# Altium PCB boardBIG.PcbDoc
Units mil, origin at the board's own origin, x right, y up, seen from the top; angles counter-clockwise.
Board outline 3600 x 3600 mil, 2 copper layers (Top Layer, Bottom Layer); 52 components, 44 nets, 217 pads, 2 vias.
Unrouted connection lines stored in the file: 68.
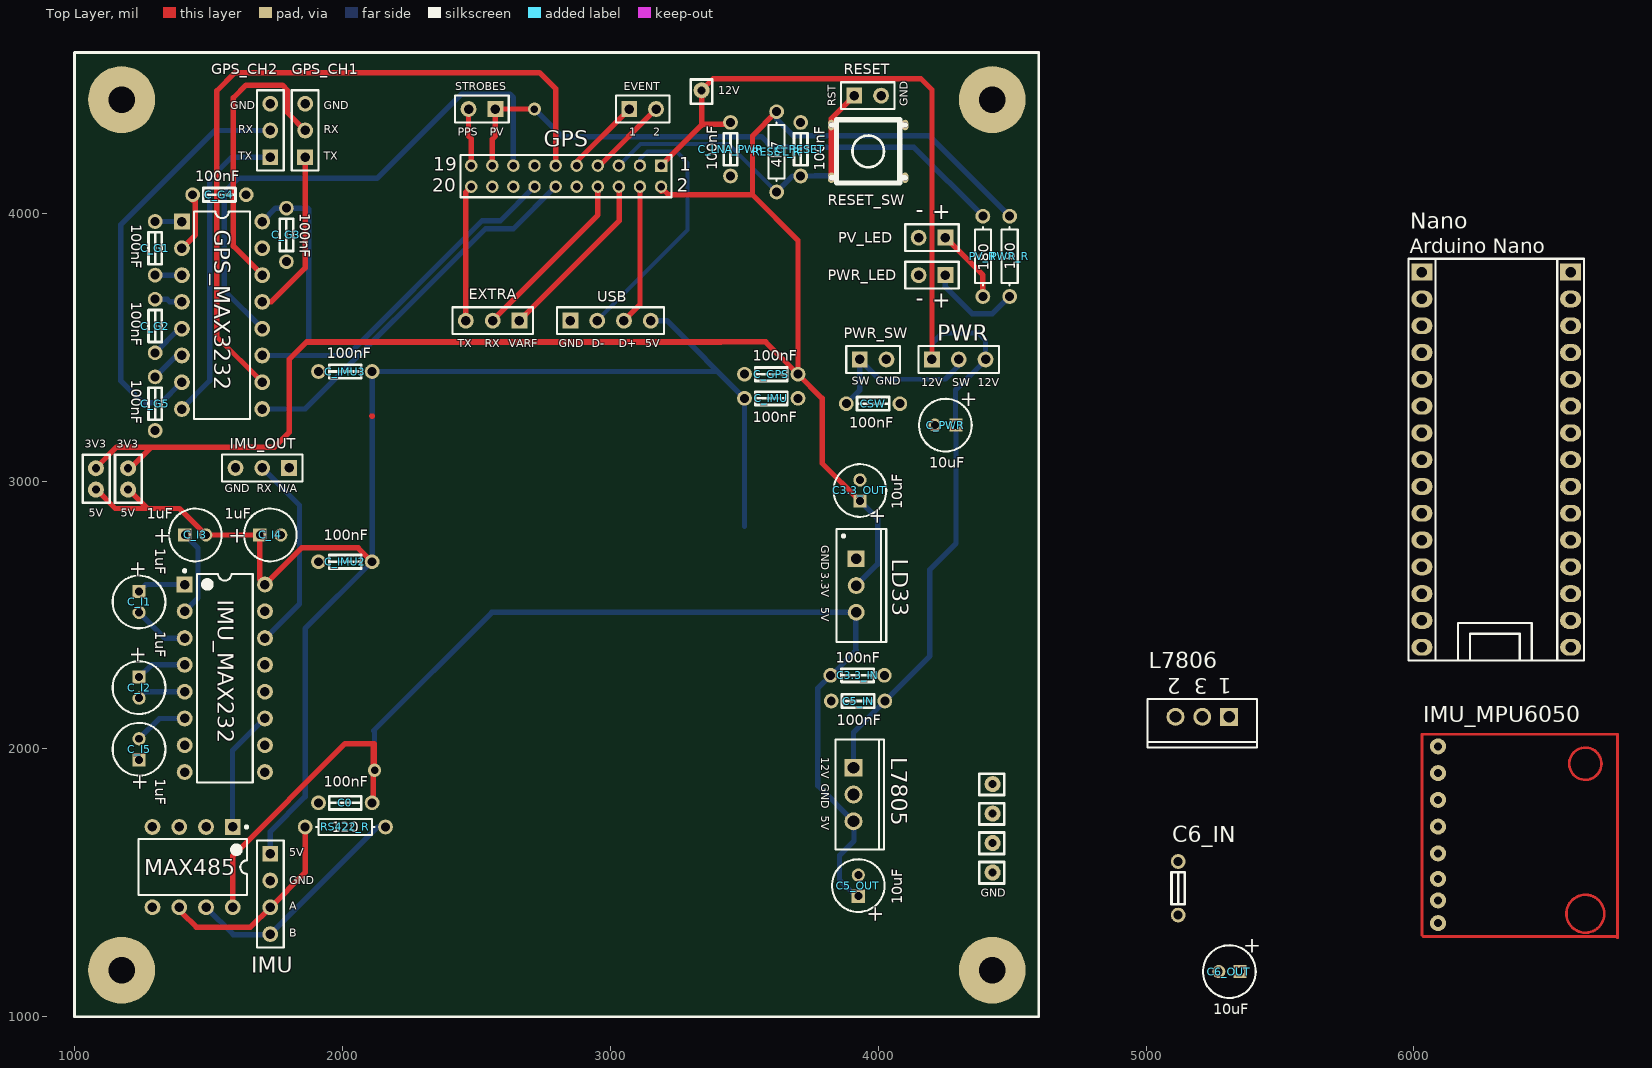
[diagram p0: Top Layer view]
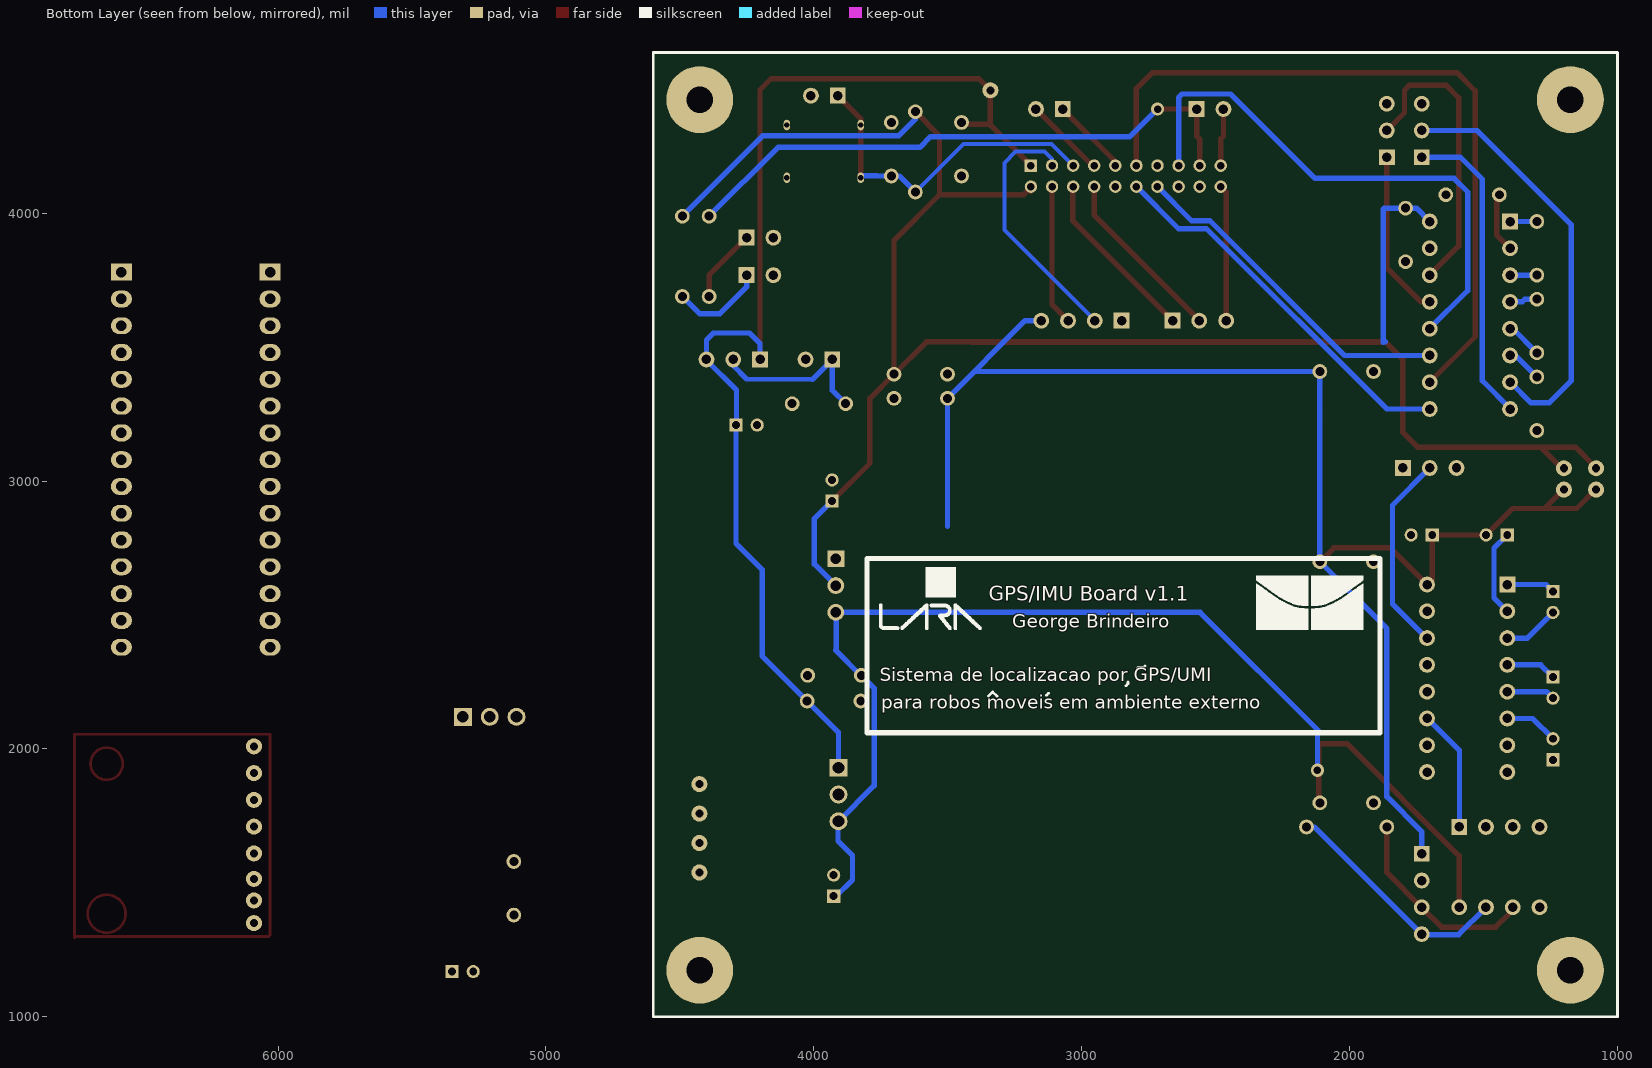
[diagram p1: Bottom Layer view, seen from below]

## Layer stack, top to bottom
Top Solder: solder mask 0.4, Solder Resist, Dk 3.5
Top Layer: signal copper 1.4
Dielectric1: dielectric 12.6, FR-4, Dk 4.8
Bottom Layer: signal copper 1.4
Bottom Solder: solder mask 0.4, Solder Resist, Dk 3.5

## Board outline
1000,1000 4600,1000 4600,4600 1000,4600

## Design rules (kind name [scope] priority, off if disabled: settings)
Clearance [All] p1: gap=10 ignorepadtopadclearanceinfootprint=FALSE except(0: Arc-Hole Track-Hole SMDPad-Hole THPad-Hole Via-Hole Fill-Hole Poly-Hole Region-Hole Text-Hole)
FabricationTestPointUsage TestPointUsage [All] p1: valid=0 allowmultiple=FALSE
FabricationTestpoint Testpoint [All] p1: side=3 testpointundercomponent=TRUE minsize=40 maxsize=100 preferedsize=60 minholesize=0 maxholesize=40 preferedholesize=32 testpointgrid=1 allowsidetop=TRUE allowsidebottom=TRUE usegrid=TRUE gridtolerance=0.01
HoleSize [All] p1: absolutevalues=TRUE maxlimit=100 minlimit=20 maxpercent=80.000 minpercent=20.000
PolygonConnect [All] p1: connectstyle=Relief reliefconductorwidth=10 reliefentries=4 polygonreliefangle="90 Angle" airgapwidth=10
RoutingVias [All] p1: holewidth=28 width=50 viastyle="Through Hole" minholewidth=28 minwidth=50 maxholewidth=28 maxwidth=50
SilkToSolderMaskClearance SilkscreenOverComponentPads [IsPad] p1: minsilkscreentomaskgap=10 clearancetoexposedcopper=TRUE
SolderMaskExpansion [All] p1: expansion=4
Width [All] p1: maxlimit=20 minlimit=6 preferedwidth=20
26 further rules are at their usual default settings.

## Components (designator, comment, footprint, x,y, rotation, side; value= is the part's Value field where it differs from the comment)
C0 "100nF" C_NANO_HOLES 1911,1799 r0 top
C3.3_IN "100nF" C_NANO_HOLES 3823,2275 r0 top
C3.3_OUT "10uF" B 3932,2965 r90 top
C5_IN "100nF" C_NANO_HOLES 4025,2179 r180 top
C5_OUT "10uF" B 3926,1490 r90 top
C6_IN "100nF" C_NANO_HOLES 5120,1380 r90 top
C6_OUT "10uF" B 5311,1169 r180 top
C_G1 "100nF" C_NANO_HOLES 1301,3769 r90 top
C_G2 "100nF" C_NANO_HOLES 1301,3479 r90 top
C_G3 "100nF" C_NANO_HOLES 1791,3819 r90 top
C_G4 "100nF" C_NANO_HOLES 1641,4069 r180 top
C_G5 "100nF" C_NANO_HOLES 1301,3189 r90 top
C_GPS "100nF" C_NANO_HOLES 3501,3399 r0 top
C_I1 "1uF" B 1241,2549 r270 top
C_I2 "1uF" B 1241,2229 r270 top
C_I3 "1uF" B 1451,2799 r0 top
C_I4 "1uF" B 1731,2799 r0 top
C_I5 "1uF" B 1241,1999 r90 top
C_IMU "100nF" C_NANO_HOLES 3701,3309 r180 top
C_IMU2 "100nF" C_NANO_HOLES 1911,2699 r0 top
C_IMU3 "100nF" C_NANO_HOLES 1911,3409 r0 top
C_LNA_PWR "100nF" C_NANO_HOLES 3449,4139 r90 top
C_PWR "10uF" B 4251,3209 r180 top
C_RESET "100nF" C_NANO_HOLES 3711,4339 r270 top
CSW "100nF" C_NANO_HOLES 3881,3289 r0 top
EVENT "Header 2" HDR1X2 3071,4389 r0 top
EXTRA "Header 3" HDR1X3 2661,3599 r180 top
GPS "Header 10X2" HDR2x10_2mm 2481,4099 r0 top
GPS_CH1 "MHDR1X3" HDR1X3 1861,4209 r90 top
GPS_CH2 "MHDR1X3" HDR1X3 1731,4209 r90 top
GPS_MAX3232 "MAX3232EEPE" PE16 1551,3619 r270 top
IMU "Header 4" HDR1X4 1731,1609 r270 top
IMU_MAX232 "MAX232ACPE" PE16A 1561,2264 r0 top
IMU_MPU6050 "MPU6050" MPU6050 6090,1350 r0 top
IMU_OUT "MHDR1X3" HDR1X3 1801,3049 r180 top
L7805 "L7805ACV" TO220ABN 3908,1830 r270 top
L7806 "L7806CV" TO220ABN 5210,2120 r180 top
LD33 "LD33V" T03B 3918,2610 r270 top
MAX485 "MAX485CPA" PA8 1441,1559 r270 top
Nano "Arduino Nano" ArduinoNano 6300,3040 r90 top
PV_LED "PV" HDR1X2 4251,3909 r180 top
PV_R "180" AXIAL-0.3 4391,3839 r90 top
PWR "Header 3" HDR1X3 4201,3454 r0 top
PWR_LED "PWR" HDR1X2 4251,3769 r180 top
PWR_R "180" AXIAL-0.3 4491,3839 r90 top
PWR_SW "Header 2" HDR1X2 3931,3454 r0 top
RESET "Header 2" HDR1X2 3911,4439 r0 top
RESET_R "4k7" AXIAL-0.3 3621,4229 r90 top
RESET_SW "SW-PB" PUSHBUTTON 4081,4349 r180 top
RS422_R "120" AXIAL-0.3 2011,1709 r0 top
STROBES "Header 2" HDR1X2 2571,4389 r180 top
USB "Header 4" HDR1X4 2851,3599 r0 top

## Footprints (in the part's own frame and the unit in brackets; to place one, negate y for a bottom-side part, rotate by r counter-clockwise, add the part's x,y. Pads: shape width x height; smd on the part's side, far side on the other; paste and mask are expansions set on the pad)
ArduinoNano [mm]
  rect 1.6x2 hole 1: 1(18.796,6.858) 30(18.796,-7.239)
  oval 1.6x2 hole 1: 2(16.256,6.858) 3(13.716,6.858) 4(11.176,6.858) 5(8.636,6.858) 6(6.096,6.858) 7(3.556,6.858) 8(1.016,6.858) 9(-1.524,6.858) 10(-4.064,6.858) 11(-6.604,6.858) 12(-9.144,6.858) 13(-11.684,6.858) 14(-14.224,6.858) 15(-16.764,6.858) 16(-16.764,-7.239) 17(-14.224,-7.239) 18(-11.684,-7.239) 19(-9.144,-7.239) 20(-6.604,-7.239) 21(-4.064,-7.239) 22(-1.524,-7.239) 23(1.016,-7.239) 24(3.556,-7.239) 25(6.096,-7.239) 26(8.636,-7.239) 27(11.176,-7.239) 28(13.716,-7.239) 29(16.256,-7.239)
  silkscreen extent -18.03,-8.51 20.07,8.13
AXIAL-0.3 [mm] "Resistor; 2 Leads"
  round 1.4 hole 0.85: 1(-3.81,0) 2(3.81,0)
  silkscreen extent -2.77,-0.76 2.77,0.76
B [mm] "Capacitor, Electrolytic, Radial; Body 5 x 6.8 mm (Dia.xH typ); Pin Spacing 2 mm (typ)"
  rect 1.25x1.25 hole 0.75: 1(-1,0)
  round 1.25 hole 0.75: 2(1,0)
  silkscreen extent -2.5,-2.5 2.5,2.5
C_NANO_HOLES [mm] "C_NANO com furos maiores"
  round 1.4 hole 0.85: 1(0,0) 2(5.08,0)
  silkscreen extent 1.02,-0.64 4.06,0.64
HDR1X2 [mm] "Connector; Header; 2 Position"
  rect 1.5x1.5 hole 0.9: 1(0,0)
  round 1.5 hole 0.9: 2(2.54,0)
  silkscreen extent -1.27,-1.27 3.81,1.27
HDR1X3 [mm] "Connector; Header; 3 Position"
  rect 1.5x1.5 hole 0.9: 1(0,0)
  round 1.5 hole 0.9: 2(2.54,0) 3(5.08,0)
  silkscreen extent -1.27,-1.27 6.35,1.27
HDR1X4 [mm] "Connector; Header; 4 Position"
  rect 1.5x1.5 hole 0.9: 1(0,0)
  round 1.5 hole 0.9: 2(2.54,0) 3(5.08,0) 4(7.62,0)
  silkscreen extent -1.27,-1.27 8.89,1.27
HDR2x10_2mm [mm]
  rect 1.18x1.18 hole 0.71: 1(18,2)
  round 1.18 hole 0.71: 2(18,0) 3(16,2) 4(16,0) 5(14,2) 6(14,0) 7(12,2) 8(12,0) 9(10,2) 10(10,0) 11(8,2) 12(8,0) 13(6,2) 14(6,0) 15(4,2) 16(4,0) 17(2,2) 18(2,0) 19(0,2) 20(0,0)
  silkscreen extent -1,-1 19,3
MPU6050 [mil]
  round 60 hole 30: 0(0,660) 1(0,560) 2(0,460) 3(0,360) 4(0,260) 5(0,165) 6(0,85) 7(0,0)
  Top Layer circle w10: c550,595 r60.21
  Top Layer circle w10: c550,35 r70.71
  Top Layer lines w10: -60,-45 -55,-50 665,-50 670,-55 670,705 -30,705 -60,705 -60,-45
PA8 [mm] "DIP, 8-Leads, Row Spacing 7.62mm, Pitch 2.54mm, Body 9.38x7.24mm"
  rect 1.5x1.5 hole 0.9: 1(-3.81,3.81)
  round 1.5 hole 0.9: 2(-3.81,1.27) 3(-3.81,-1.27) 4(-3.81,-3.81) 5(3.81,-3.81) 6(3.81,-1.27) 7(3.81,1.27) 8(3.81,3.81)
  silkscreen extent -3.93,-5.15 2.65,5.24
PE16 [mm] "DIP; 16 Leads; Row Spacing 7.62 mm; Pitch 2.54 mm"
  rect 1.5x1.5 hole 0.9: 1(-8.89,-3.81)
  round 1.5 hole 0.9: 2(-6.35,-3.81) 3(-3.81,-3.81) 4(-1.27,-3.81) 5(1.27,-3.81) 6(3.81,-3.81) 7(6.35,-3.81) 8(8.89,-3.81) 9(8.89,3.81) 10(6.35,3.81) 11(3.81,3.81) 12(1.27,3.81) 13(-1.27,3.81) 14(-3.81,3.81) 15(-6.35,3.81) 16(-8.89,3.81)
  silkscreen extent -9.85,-2.65 9.85,2.65
PE16A [mm] "DIP, 16-Leads, Row Spacing 7.62mm, Pitch 2.54mm, Body 19.18x6.99mm"
  rect 1.5x1.5 hole 0.9: 1(-3.81,8.89)
  round 1.5 hole 0.9: 2(-3.81,6.35) 3(-3.81,3.81) 4(-3.81,1.27) 5(-3.81,-1.27) 6(-3.81,-3.81) 7(-3.81,-6.35) 8(-3.81,-8.89) 9(3.81,-8.89) 10(3.81,-6.35) 11(3.81,-3.81) 12(3.81,-1.27) 13(3.81,1.27) 14(3.81,3.81) 15(3.81,6.35) 16(3.81,8.89)
  silkscreen extent -3.93,-9.9 2.65,10.31
PUSHBUTTON [mm]
  oval 0.6x1 hole 0.5: 1(-0.5,5.5) 1_1(-0.5,0.5) 2(6.5,5.5) 2_1(6.5,0.5)
  silkscreen extent -0.5,0 6.5,6
T03B [mm] "TO, Thru-Hole, Vertical, Heatsink Mounted; 3 In-Line Leads; Pitch 2.54 mm"
  rect 1.6x1.6 hole 1: 1(-2.54,0)
  round 1.6 hole 1: 2(0,0) 3(2.54,0)
  silkscreen extent -5.35,-1.85 5.35,2.85
TO220ABN [mm] "TO, Thru-Hole, Vertical, Heatsink Mounted; 3 In-Line Leads; Pitch 2.54 mm; Pin sequence 1, 3, 2"
  rect 1.7x1.7 hole 1.1: 1(-2.54,0)
  round 1.7 hole 1.1: 2(2.54,0) 3(0,0)
  silkscreen extent -5.2,-1.7 5.2,2.9

## Part data
C0 C3.3_IN C5_IN C6_IN C_G1 C_G2 C_G3 C_G4 C_G5 C_GPS C_IMU C_IMU2 C_IMU3 C_LNA_PWR C_RESET CSW: library part Cap, "Capacitor", LatestRevisionDate=17-Jul-2002, LatestRevisionNote="Re-released for DXP Platform.", PackageReference=RAD-0.3, Published=8-Jun-2000, Publisher="Altium Limited"
C3.3_OUT C5_OUT C6_OUT C_I1 C_I2 C_I3 C_I4 C_I5 C_PWR: library part "Cap Pol1", "Polarized Capacitor (Radial)", LatestRevisionDate=17-Jul-2002, LatestRevisionNote="Re-released for DXP Platform.", PackageReference=RB7.6-15, Published=8-Jun-2000, Publisher="Altium Limited"
EVENT STROBES: "Header, 2-Pin", LatestRevisionDate=17-Jul-2002, LatestRevisionNote="Re-released for DXP Platform.", Publisher="Altium Limited"
EXTRA GPS_CH1 GPS_CH2 IMU_OUT: "Header, 3-Pin", LatestRevisionDate=17-Jul-2002, LatestRevisionNote="Re-released for DXP Platform.", Publisher="Altium Limited"
GPS: "Header, 10-Pin, Dual row", LatestRevisionDate=17-Jul-2002, LatestRevisionNote="Re-released for DXP Platform.", Publisher="Altium Limited"
GPS_MAX3232: "±15kV ESD-Protected, 3.0V to 5.5V, Low-Power, up to 250kbps, True RS-232 Transceiver", Code_JEDEC=MS-001-BB, ComponentLink1Description="Manufacturer Link", ComponentLink1URL=http://www.maxim-ic.com/, ComponentLink2Description=Datasheet, ComponentLink2URL=http://pdfserv.maxim-ic.com/en/ds/MAX3222E-MAX3246E.pdf, DatasheetVersion=Mar-1999, LatestRevisionDate=06-Jun-2005, LatestRevisionNote="Stylized 3D Model Added.", PackageDescription="DIP; 16 Leads; Row Spacing 7.62 mm; Pitch 2.54 mm", PackageReference=PE16, PackageVersion=Aug-2000, Published=16-Jan-2001, Publisher="Altium Limited"
IMU USB: "Header, 4-Pin", LatestRevisionDate=17-Jul-2002, LatestRevisionNote="Re-released for DXP Platform.", Publisher="Altium Limited"
IMU_MAX232: "+5V Powered, Multi-Channel RS-232 Driver/Receiver", Code_JEDEC=MS-001-BB, ComponentLink1Description="Manufacturer Link", ComponentLink1URL=http://www.maxim-ic.com/, ComponentLink2Description=Datasheet, ComponentLink2URL=http://pdfserv.maxim-ic.com/en/ds/MAX220-MAX249.pdf, LatestRevisionDate=06-Jun-2005, LatestRevisionNote="Stylized 3D Model Added.", PackageDescription="DIP; 16 Leads; Row Spacing 7.62 mm; Pitch 2.54 mm", PackageReference=PE16A, PackageVersion=1997, Published=16-Jan-2001, Publisher="Altium Limited"
IMU_MPU6050 Nano: library part Component_1
L7805: "Precision 1A Regulator", ComponentLink1Description="Manufacturer Link", ComponentLink1URL=http://www.st.com/, ComponentLink2Description=Datasheet, ComponentLink2URL=http://www.st.com/stonline/products/literature/ds/2144/l7805ab.pdf, DatasheetVersion=Nov-1999, LatestRevisionDate=17-Jul-2002, LatestRevisionNote="Re-released for DXP Platform.", Note="Tab is connected to pin 3 (GND).", PackageDescription="TO, Thru-Hole, Vertical, Heatsink Mounted; 3 In-Line Leads; Pitch 2.54 mm; Pin sequence 1, 3, 2", PackageReference=TO220ABN, PackageVersion=Jun-1998, Published=24-Aug-2001, Publisher="Altium Limited"
L7806: "Positive Voltage Regulator", ComponentLink1Description="Manufacturer Link", ComponentLink1URL=http://www.st.com/, DatasheetVersion=Dec-1998, LatestRevisionDate=17-Jul-2002, LatestRevisionNote="Re-released for DXP Platform.", Note="Tab is connected to pin 3 (GND).", PackageDescription="TO, Thru-Hole, Vertical, Heatsink Mounted; 3 In-Line Leads; Pitch 2.54 mm; Pin sequence 1, 3, 2", PackageReference=TO220ABN, PackageVersion=Jun-1998, Published=24-Aug-2001, Publisher="Altium Limited"
LD33: library part LM1117T-3.3, "800mA Low-Dropout Linear Regulator", DigiKeyPartNumber=LM1117T-3.3-ND, Manufacturer="National Semiconductor", PackageTopMarking=NSUZXYTTE#*LM1117T*3.3, ComponentLink1Description="LM1117 Datasheet", ComponentLink1URL=http://www.national.com/ds/LM/LM1117.pdf, ComponentLink2Description="LM1117 Web Page", ComponentLink2URL=http://www.national.com/pf/LM/LM1117.html, ComponentLink3Description="T03B Package Page", ComponentLink3URL=http://www.national.com/packaging/folders/t03b.html, CompType="LDO IC", DatasheetVersion=Apr-2006, PackageDescription="TO-220, Molded, 3 Lead, Straight", PackageReference=T03B, PackageVersion="revL, Jan-1992", PartNumber=LM1117T-3.3, PinCount=3, Published=4-Dec-2008, Publisher="Altium Limited", RoHS=O
MAX485: "Low-Power, Slew-Rate-Limited RS-485/RS-422 Transceiver", Code_JEDEC=MS-001-AB, ComponentLink1Description="Manufacturer Link", ComponentLink1URL=http://www.maxim-ic.com/, ComponentLink2Description=Datasheet, ComponentLink2URL=http://pdfserv.maxim-ic.com/en/ds/MAX1487-MAX491.pdf, DatasheetVersion=Feb-1996, LatestRevisionDate=29-May-2009, LatestRevisionNote="Component Body Added.", PackageDescription="DIP, 8-Pin, Row Spacing 7.62 mm, Pitch 2.54 mm", PackageReference=PA8, PackageVersion="RevB, 21-0043", Published=16-Jan-2001, Publisher="Altium Limited"
PV_LED PWR_LED: library part LED0, "Typical INFRARED GaAs LED", LatestRevisionDate=08-Jul-2005, LatestRevisionNote="Mech Layer 1 removed.", PackageReference=LED-0, Published=8-Jun-2000, Publisher="Altium Limited"
PV_R PWR_R RESET_R RS422_R: library part Res1, "Resistor", LatestRevisionDate=17-Jul-2002, LatestRevisionNote="Re-released for DXP Platform.", PackageReference=AXIAL-0.3, Published=8-Jun-2000, Publisher="Altium Limited"
PWR: library part "Header 3H", "Header, 3-Pin, Right Angle", LatestRevisionDate=17-Jul-2002, LatestRevisionNote="Re-released for DXP Platform.", Publisher="Altium Limited"
PWR_SW RESET: library part "Header 2H", "Header, 2-Pin, Right Angle", LatestRevisionDate=17-Jul-2002, LatestRevisionNote="Re-released for DXP Platform.", Publisher="Altium Limited"
RESET_SW: "Switch", LatestRevisionDate=17-Jul-2002, LatestRevisionNote="Re-released for DXP Platform.", PackageReference=SPST-2, Published=24-Mar-1999, Publisher="Altium Limited"

## Free pads (board coordinates)
  round 60 hole 30: 0(1080,3048) 0(1200,3048) 1(1080,2968) 1(1200,2968) 2(3341,4459) 3(4427,1539) 3(4427,1649) 3(4427,1759) 3(4427,1869)
  round 250 hole 100: 0(1176,4424) 1(4426,4424) 2(4426,1174) 3(1176,1174)

## Via types
v1: diameter 50, hole 28, Top Layer to Bottom Layer, 2 vias

## Nets (pads, with @x,y where several pads share a name; then routed paths per layer and width w, separated by ;. In a path a pad name is that pad's centre, name@x,y a point inside that pad or via, vN(x,y) a via of type N, cw(c..) or ccw(c..) an arc to the next point about the centre after c; other vN are vias at no path point)
3.3V: C3.3_OUT.1 C_G3.2 C_GPS.2 GPS.2 GPS_MAX3232.16 LD33.2 pad.0@1080,3048 pad.0@1200,3048 PWR_R.2 RESET_R.2 | length 8851.1
  Top Layer w20: pad.0@1080,3048 1080,3050 1157,3127 1287,3127 ; pad.0@1200,3050 1200,3048 1200,3040 1287,3127 ; 1874,3519 3412,3519 ; GPS.2 3189,4097 GPS.2@3196.67,4089.33 ; GPS.2@3190,4082.66 GPS.2@3196.67,4089.33 ; GPS.2@3201.34,4094 GPS.2@3196.67,4089.33 ; RESET_R.2 3531,4289 3531,4069 ; C3.3_OUT.1 3791,3066.63 3791,3309 C_GPS.2 ; 1287,3127 1746,3127 1802,3183 1802,3456 1866,3520 3580,3520 C_GPS.2 ; GPS.2@3196.67,4089.33 3217,4069 3531,4069 ; 3531,4069 3701,3899 C_GPS.2
  Bottom Layer w20: GPS_MAX3232.16 1751,4019 C_G3.2 1871,4019 1874,4016 1874,3519 1866,3520 ; RESET_R.2 3621,4351.44 3682.81,4289.63 4190.37,4289.63 PWR_R.2 ; LD33.2 3998,2690 3998,2859.63 C3.3_OUT.1
5V: C0.2 C3.3_IN.1 C5_OUT.1 C_I3.2 C_I4.1 IMU_MAX232.16 IMU_MPU6050.0 L7805.2 LD33.3 MAX485.8 pad.1@1080,2968 pad.1@1200,2968 USB.4 | length 7000.1
  Top Layer w20: pad.1@1080,2968 1080,2970 1152,2898 1272,2898 ; pad.1@1200,2968 1200,2970 1272,2898 ; MAX485.8 1591,1601 2010,2020 2115,2020 ; 2110,3243 2111,3242 ; 2110,3405 2111,3406 ; C0.2@2115,1799 2115,2020 ; 2115,2695 2059,2751 1848,2751 IMU_MAX232.16 1692,2633 1692,2715 1691.63,2715.37 C_I4.1 C_I3.2 1391.37,2898 1272,2898 ; v1(2120,1920) 2120,2015 ; 2120,2020 2120,2015 ; 2115,2020 2120,2015
  Bottom Layer w20: v1(2120,1920) 2120,2064 2116,2068 2558,2510 LD33.3@3917,2510 ; USB.4 3211,3599 3501,3309 3501,2831 ; 3917,2372 LD33.3@3917,2510 ; 3918,2368 3823,2273 C3.3_IN.1 3775,2227 3775,1863 L7805.2 3910,1728 3910,1657 3856,1603 3856,1511 3916.37,1450.63 C5_OUT.1 ; LD33.3 LD33.3@3917,2510
6V: C6_OUT.1 C_IMU2.2 C_IMU3.2 C_IMU.2 IMU.1 L7806.2 Nano.30 | length 3388.8
  Bottom Layer w20: IMU.1 1731,1692 1861,1822 1861,2449 C_IMU2.2 C_IMU3.2 3401,3409 C_IMU.2
12V: C5_IN.1 C6_IN.1 C_LNA_PWR.2 C_PWR.1 CSW.2 GPS.1 L7805.1 L7806.1 pad.2@3341,4459 PWR.1 PWR.3 PWR_SW.2 | length 4448.7
  Top Layer w20: GPS.1 3341,4329.08 ; C_LNA_PWR.2 3442,4332 3341,4332 3341,4459 3384,4502 4160,4502 4201,4461 PWR.1 ; C_PWR.1 C_PWR.1@4291,3208.37
  Bottom Layer w20: L7805.1 3908,2062 C5_IN.1 4193,2347 4193,2670 4290.37,2767.37 C_PWR.1@4290.37,3207.74 ; PWR.1 4201,3514 4240,3553 4375,3553 4401,3527 PWR.3 4402,3453 4289,3340 4289,3206.37 C_PWR.1@4290.37,3207.74 ; C_PWR.1 C_PWR.1@4290.37,3207.74
GND: C0.1 C3.3_IN.2 C3.3_OUT.2 C5_IN.2 C5_OUT.2 C6_IN.2 C6_OUT.2 C_G3.1 C_G4.1 C_G5.1 C_GPS.1 C_I4.2 C_I5.1 C_IMU2.1 C_IMU3.1 C_IMU.1 C_LNA_PWR.1 C_PWR.2 C_RESET.1 GPS.10 GPS.13 GPS.16 GPS.18 GPS_CH1.3 GPS_CH2.3 GPS_MAX3232.15 IMU.2 IMU_MAX232.15 IMU_MPU6050.1 IMU_OUT.3 L7805.3 L7806.3 LD33.1 MAX485.2 MAX485.3 MAX485.4 MAX485.5 Nano.4 Nano.29 pad.3@4427,1539 pad.3@4427,1649 pad.3@4427,1759 pad.3@4427,1869 PV_LED.2 PWR_LED.2 RESET.2 RESET_SW.1 RESET_SW.1_1 USB.1
GPS_CAN2_RX: EXTRA.2 GPS.8 | length 662.3
  Top Layer w20: EXTRA.2 2562,3602 2953.44,3993.44 GPS.8
GPS_CAN2_TX: EXTRA.3 GPS.20 | length 508.3
  Top Layer w20: EXTRA.3 2461,4079 GPS.20
GPS_COM1_RX: GPS.15 GPS_MAX3232.12 | length 2059.3
  Bottom Layer w20: GPS_MAX3232.12 1559,3711 1559,4079 1610,4130 2129.44,4130 2444.44,4445 2625,4445 2638.48,4431.52 GPS.15
GPS_COM1_TX: GPS.14 GPS_MAX3232.11 | length 1277.2
  Bottom Layer w20: GPS_MAX3232.11 2018.57,3469 2521.57,3972 2590.22,3972 GPS.14
GPS_COM2_RX: GPS.12 GPS_MAX3232.9 | length 1438.8
  Bottom Layer w20: GPS_MAX3232.9 1861,3269 2534,3942 2638.96,3942 GPS.12
GPS_COM2_TX: GPS.11 GPS_MAX3232.10 | length 2763.7
  Top Layer w20: GPS_MAX3232.10 1531,3539 1531,4457 1599,4525 2736,4525 2795.96,4465.04 GPS.11
GPS_EVENT1: EVENT.1 GPS.9 | length 294.3
  Top Layer w20: GPS.9 2878,4178 2878,4196 EVENT.1
GPS_EVENT2: EVENT.2 GPS.7 | length 305.8
  Top Layer w20: GPS.7 2953.44,4179 2961,4179 EVENT.2
GPS_PPS: GPS.19 STROBES.2 | length 215.4
  Top Layer w20: STROBES.2 2471,4288 2481,4278 GPS.19
GPS_PV: GPS.17 PV_R.2 STROBES.1 | length 2201.6
  Top Layer w20: GPS.17 2559.74,4277 2571,4288.26 STROBES.1 v1(2717,4389)
  Bottom Layer w20: v1(2717,4389) 2820,4286 3564,4286 3604,4246 4134,4246 PV_R.2
GPS_RESETIN: C_RESET.2 GPS.5 RESET.1 RESET_R.1 RESET_SW.2 RESET_SW.2_1 | length 1270.8
  Top Layer w20: RESET_SW.2 RESET_SW.2_1 3825.09,4353.09 RESET.1
  Bottom Layer w15: GPS.5 3112.44,4258 3442,4258 RESET_R.1
  Bottom Layer w20: RESET_R.1 3681,4139 C_RESET.2 3764,4139 3765,4140 3817.56,4140 RESET_SW.2
GPS_USB_D+: GPS.4 USB.3 | length 524.8
  Top Layer w20: USB.3 3110.92,3658.92 GPS.4
GPS_USB_D-: GPS.3 USB.2 | length 961.9
  Bottom Layer w15: USB.2@2952,3601 3289,3938 3289,4188 3246.5,4230.5 3138.5,4230.5 3110.92,4202.92 GPS.3
  Bottom Layer w20: USB.2 2951,3601 USB.2@2952,3601
GPS_VARF: EXTRA.1 GPS.6 | length 658.2
  Top Layer w20: EXTRA.1 3033,3971 3033,4101 GPS.6
IMU_HRS_A: IMU.3 MAX485.6 RS422_R.1 | length 767.4
  Top Layer w20: MAX485.6 1401.98,1409 1401.98,1388.02 1455,1335 1657,1335 IMU.3 1861,1539 RS422_R.1
IMU_HRS_B: IMU.4 MAX485.7 RS422_R.2 | length 878.8
  Bottom Layer w20: MAX485.7 1593,1307 1729,1307 IMU.4 2131,1709 RS422_R.2
IMU_TX: IMU_MAX232.11 MAX485.1 | length 456.7
  Bottom Layer w20: MAX485.1 1590,1710 1590,1995 1709,2114 IMU_MAX232.11
J1_RX: GPS_CH1.2 GPS_MAX3232.14 Nano.5 | length 1113.4
  Top Layer w20: GPS_MAX3232.14 1593,3877 1593,4431 1640,4478 1776,4478 1795,4459 1795,4375 GPS_CH1.2
J1_TX: GPS_CH1.1 GPS_MAX3232.13 Nano.6 | length 625.6
  Top Layer w20: GPS_MAX3232.13 1734,3669 1861,3796 GPS_CH1.1
J2_RX: GPS_CH2.2 GPS_MAX3232.7 Nano.7 | length 1581.2
  Bottom Layer w20: GPS_MAX3232.7 1400,3369 1323,3292 1255,3292 1173,3374 1173,3958 1524,4309 GPS_CH2.2
J2_TX: GPS_CH2.1 GPS_MAX3232.8 Nano.8 | length 1169.8
  Bottom Layer w20: GPS_MAX3232.8 1397,3267 1505,3375 1505,4128 1586,4209 GPS_CH2.1
J3_RX: IMU_MAX232.14 IMU_OUT.2 Nano.9 | length 748
  Bottom Layer w20: IMU_OUT.2 1840,2910 1840,2542 1711,2413 IMU_MAX232.14
NetC_G1_1: C_G1.1 GPS_MAX3232.3 | length 100
  Bottom Layer w20: C_G1.1 GPS_MAX3232.3
NetC_G1_2: C_G1.2 GPS_MAX3232.1 | length 100
  Bottom Layer w20: C_G1.2 GPS_MAX3232.1
NetC_G2_1: C_G2.1 GPS_MAX3232.5 | length 137.3
  Bottom Layer w20: C_G2.1 1391,3569 GPS_MAX3232.5
NetC_G2_2: C_G2.2 GPS_MAX3232.4 | length 104.1
  Bottom Layer w20: C_G2.2 1346,3679 1356,3669 GPS_MAX3232.4
NetC_G4_2: C_G4.2 GPS_MAX3232.2 | length 230.7
  Top Layer w20: GPS_MAX3232.2 1451,3919 1451,4048 1441,4048 C_G4.2
NetC_G5_2: C_G5.2 GPS_MAX3232.6 | length 133.1
  Bottom Layer w20: C_G5.2 1381,3469 GPS_MAX3232.6
NetC_I1_1: C_I1.1 IMU_MAX232.1 | length 180.6
  Bottom Layer w20: C_I1.1 1266.63,2614 IMU_MAX232.1
NetC_I1_2: C_I1.2 IMU_MAX232.3 | length 209.6
  Bottom Layer w20: C_I1.2 1336.63,2414 IMU_MAX232.3
NetC_I2_1: C_I2.1 IMU_MAX232.4 | length 188.9
  Bottom Layer w20: C_I2.1 1286.63,2314 IMU_MAX232.4
NetC_I2_2: C_I2.2 IMU_MAX232.5 | length 180.1
  Bottom Layer w20: C_I2.2 1265.37,2214 IMU_MAX232.5
NetC_I3_1: C_I3.1 IMU_MAX232.2 | length 326.2
  Bottom Layer w20: IMU_MAX232.2 1461,2564 1461,2749.63 C_I3.1
NetC_I5_2: C_I5.2 IMU_MAX232.6 | length 201.3
  Bottom Layer w20: C_I5.2 1316.63,2114 IMU_MAX232.6
NetPV_LED_1: PV_LED.1 PV_R.1 | length 278
  Top Layer w20: PV_LED.1 4391,3769 PV_R.1
NetPWR_LED_1: PWR_LED.1 PWR_R.1 | length 351.9
  Bottom Layer w20: PWR_LED.1 4251,3725 4351,3625 4427,3625 PWR_R.1
PWR_SW_2: CSW.1 PWR.2 PWR_SW.1 | length 630.4
  Bottom Layer w20: CSW.1 3931,3339 PWR_SW.1 4005.86,3379.14 4251.16,3381.16 4301,3431 PWR.2
SCL_MPU6050: IMU_MPU6050.2 Nano.24
SDA_MPU6050: IMU_MPU6050.3 Nano.23
pads on no net: IMU_MAX232.7 IMU_MAX232.8 IMU_MAX232.9 IMU_MAX232.10 IMU_MAX232.12 IMU_MAX232.13 IMU_MPU6050.4 IMU_MPU6050.5 IMU_MPU6050.6 IMU_MPU6050.7 IMU_OUT.1 Nano.1 Nano.2 Nano.3 Nano.10 Nano.11 Nano.12 Nano.13 Nano.14 Nano.15 Nano.16 Nano.17 Nano.18 Nano.19 Nano.20 Nano.21 Nano.22 Nano.25 Nano.26 Nano.27 Nano.28

## Silkscreen, mask and mechanical layers (free items; w line width, h text height)
Top Overlay:
  lines w10: 1000,1000 4600,1000 4600,4600 1000,4600 1000,1000 ; 1031,2919 1131,2919 1131,3099 1031,3099 1031,2919 ; 1151,2919 1251,2919 1251,3099 1151,3099 1151,2919 ; 3301,4409 3381,4409 3381,4499 3301,4499 3301,4409 ; 4378,1498 4378,1578 4471,1578 4471,1498 4378,1498 ; 4378,1608 4471,1608 4471,1688 4378,1688 4378,1608 ; 4378,1718 4471,1718 4471,1798 4378,1798 4378,1718 ; 4378,1828 4471,1828 4471,1908 4378,1908 4378,1828
  text "12V" at 3403,4445 h30
  text "RST" at 3841,4399 h30 r90
  text "GND" at 4111,4399 h30 r90
  text "GND" at 1581,4389 h30
  text "GND" at 1931,4389 h30
  text "RX" at 1611,4299 h30
  text "RX" at 1931,4299 h30
  text "PPS" at 2431,4289 h30
  text "PV" at 2551,4289 h30
  text "1" at 3071,4289 h30
  text "2" at 3161,4289 h30
  text "TX" at 1611,4199 h30
  text "TX" at 1931,4199 h30
  text "-" at 4171,4029 h60 r180
  text "+" at 4271,4029 h60 r180
  text "-" at 4171,3699 h60 r180
  text "+" at 4271,3699 h60 r180
  text "TX" at 2431,3499 h30
  text "RX" at 2531,3499 h30
  text "VARF" at 2621,3499 h30
  text "GND" at 2808,3499 h30
  text "D-" at 2931,3499 h30
  text "D+" at 3031,3499 h30
  text "5V" at 3130,3499 h30
  text "SW" at 3901,3359 h30
  text "GND" at 3991,3359 h30
  text "12V" at 4161,3354 h30
  text "SW" at 4276.01,3354 h30
  text "12V" at 4371,3354 h30
  text "3V3" at 1038,3124 h30
  text "3V3" at 1158,3124 h30
  text "GND" at 1561,2959 h30
  text "RX" at 1681,2959 h30
  text "N/A" at 1761,2959 h30
  text "5V" at 1053,2867 h30
  text "5V" at 1173,2867 h30
  text "GND" at 3788,2760 h30 r270
  text "3.3V" at 3788,2660 h30 r270
  text "5V" at 3788,2530 h30 r270
  text "12V" at 3788,1970 h30 r270
  text "GND" at 3788,1870 h30 r270
  text "5V" at 3788,1750 h30 r270
  text "5V" at 1801,1599 h30
  text "GND" at 1801,1496 h30
  text "GND" at 4383,1448 h30
  text "A" at 1801,1399 h30
  text "B" at 1801,1299 h30
Bottom Overlay:
  drawing of 1234 lines, arcs and shapes, not listed
  text "GPS/IMU Board v1.1" at 3347,2553 h55
  text "George Brindeiro" at 3260,2453 h50
  text "Sistema de localizacao por GPS/UMI" at 3754,2253 h50
  text "para robos moveis em ambiente externo" at 3749,2151 h50

## Text inside footprints (layer, text, board x,y; h text height)
C3.3_OUT: Top Overlay "+" at 4022,2835 h59.06 r90
C5_OUT: Top Overlay "+" at 4016,1350 h59.06 r90
C6_OUT: Top Overlay "+" at 5431,1289 h59.06 r180
C_I1: Top Overlay "+" at 1211.47,2705.5 h59.06 r270
C_I2: Top Overlay "+" at 1211.47,2385.5 h59.06 r270
C_I3: Top Overlay "+" at 1294.5,2769.47 h59.06
C_I4: Top Overlay "+" at 1574.5,2769.47 h59.06
C_I5: Top Overlay "+" at 1270.53,1842.5 h59.06 r90
C_PWR: Top Overlay "+" at 4371,3329 h59.06 r180
GPS: Top Overlay "2" at 3248.72,4079.31 h50; Top Overlay "1" at 3257.05,4158.06 h50; Top Overlay "19" at 2339.04,4158.06 h50; Top Overlay "20" at 2334.87,4079.31 h50
L7806: Top Overlay "3" at 5229.69,2264.68 h59.06 r180; Top Overlay "2" at 5129.69,2264.68 h59.06 r180; Top Overlay "1" at 5319.84,2264.69 h59.06 r180